# Altium PCB ControlPlateSTM32.PcbDoc
Units mm, origin at the board's own origin, x right, y up, seen from the top; angles counter-clockwise.
Board outline 208.41 x 101.6 mm, 2 copper layers (Top Layer, Bottom Layer); 63 components, 58 nets, 200 pads, 64 vias.
Unrouted connection lines stored in the file: 2.
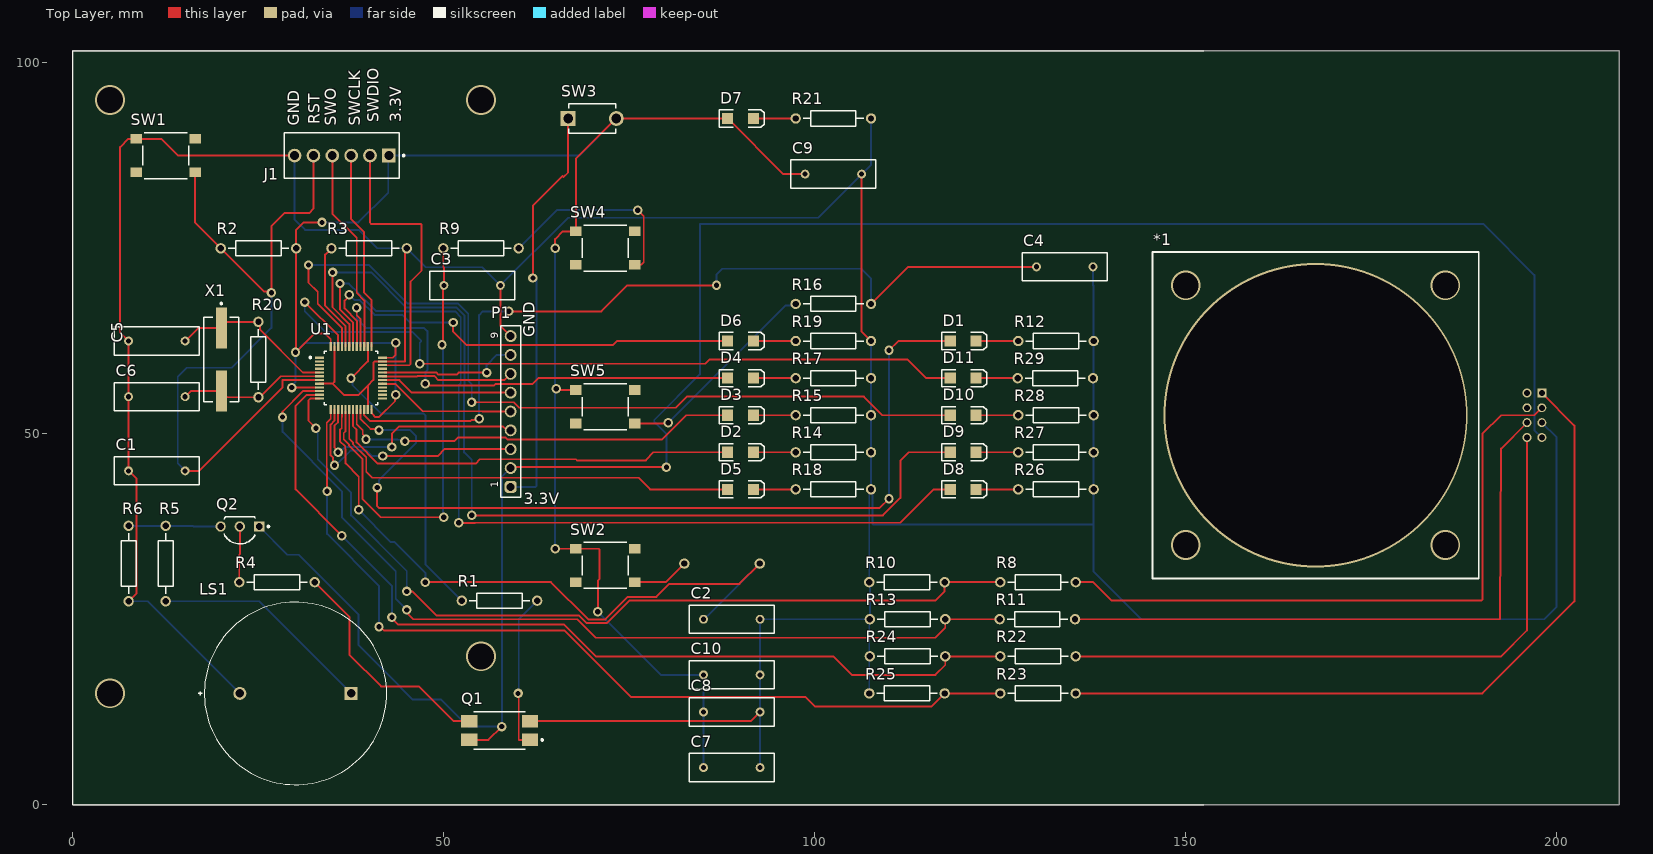
[diagram p0: Top Layer view]
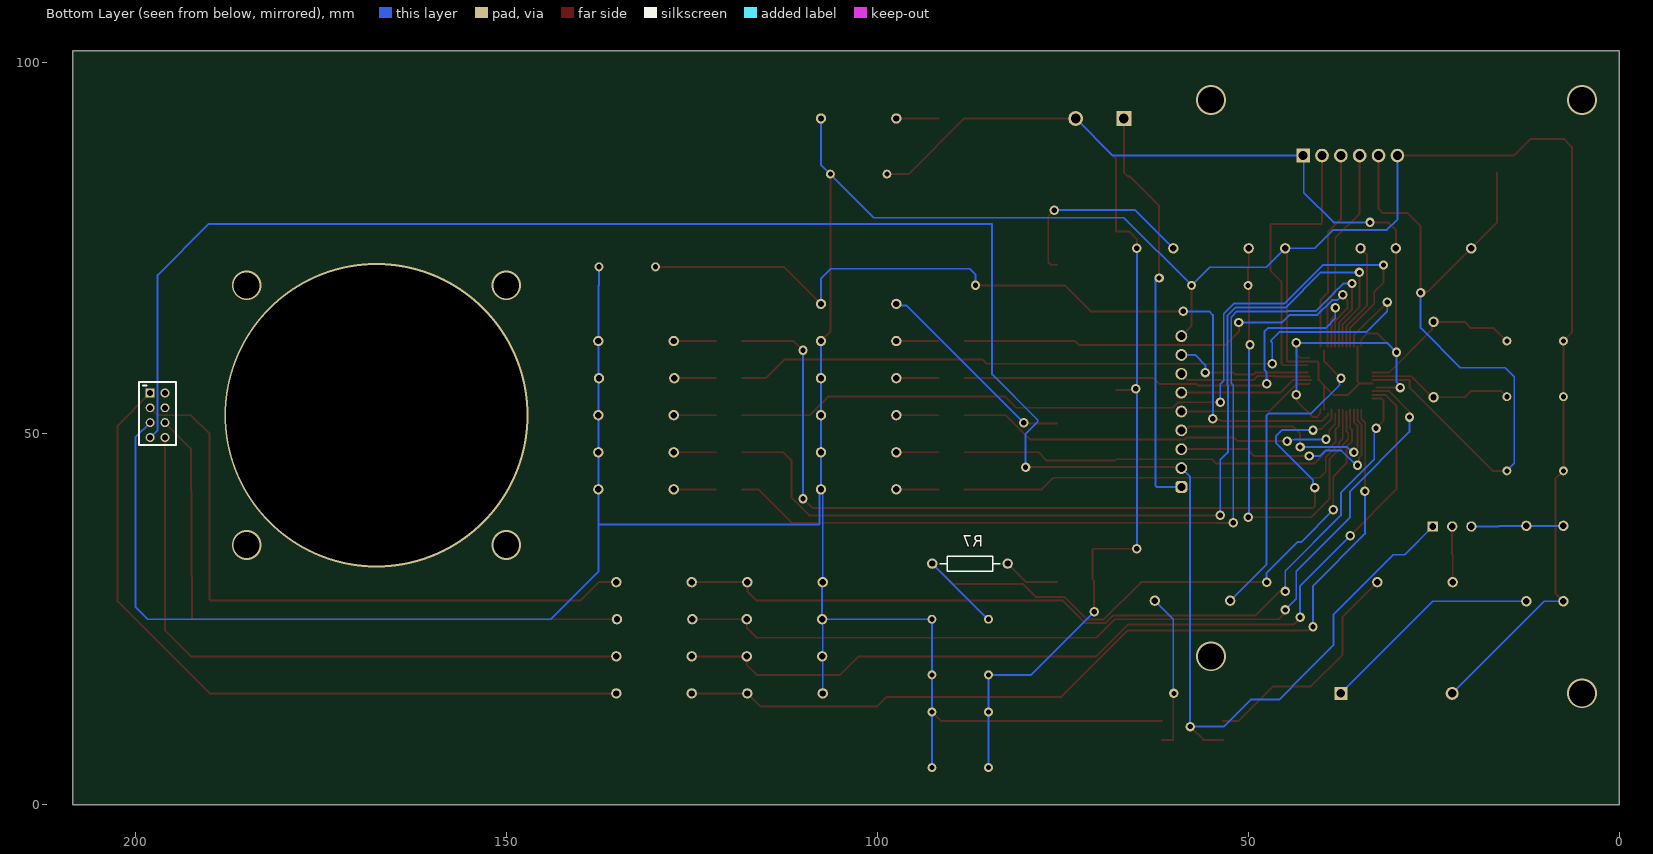
[diagram p1: Bottom Layer view, seen from below]

## Layer stack, top to bottom
Top Solder: solder mask 0.0102, Solder Resist, Dk 3.5
Top Layer: signal copper 0.0356
Dielectric 1: dielectric 0.32, FR-4, Dk 4.8
Bottom Layer: signal copper 0.0356
Bottom Solder: solder mask 0.0102, Solder Resist, Dk 3.5

## Board outline
0,0 208.407,0 208.407,101.6 0,101.6

## Design rules (kind name [scope] priority, off if disabled: settings)
Clearance [All] p1: gap=0.254 ignorepadtopadclearanceinfootprint=FALSE except(0: Arc-Hole Track-Hole SMDPad-Hole THPad-Hole Via-Hole Fill-Hole Poly-Hole Region-Hole Text-Hole; 0.1: Arc-SMDPad Track-SMDPad SMDPad-SMDPad SMDPad-Fill SMDPad-Poly SMDPad-Region)
PolygonConnect [All] p1: connectstyle=Relief reliefconductorwidth=0.254 reliefentries=4 polygonreliefangle="90 Angle" airgapwidth=0.254
RoutingVias [All] p1: holewidth=0.711 width=1.27 viastyle="Through Hole" minholewidth=0.711 minwidth=1.27 maxholewidth=0.711 maxwidth=1.27
SolderMaskExpansion [All] p1: expansion=0.102 istentingtop=FALSE
Width [All] p1: maxlimit=1 minlimit=0.254 preferedwidth=0.254 minimp=50.000000 maximp=50.000000 favimp=50.000000
30 further rules are at their usual default settings.

## Components (designator, comment, footprint, x,y, rotation, side; value= is the part's Value field where it differs from the comment)
*1 "MLX90333_JoysticPlate" MLX90333_Joy 167.5,52.5 r0 top
C1 "Cap" RAD-0.3 11.31,45 r0 top value=100uF
C2 "Cap" RAD-0.3 88.81,25 r0 top value=100uF
C3 "Cap" RAD-0.3 53.81,70 r0 top value=100uF
C4 "Cap" RAD-0.3 133.69,72.5 r0 top value=100uF
C5 "Cap" RAD-0.3 11.31,62.5 r180 top value=20pF
C6 "Cap" RAD-0.3 11.31,55 r180 top value=20pF
C7 "Cap" RAD-0.3 88.81,5 r180 top value=100nF
C8 "Cap" RAD-0.3 88.81,12.5 r180 top value=100nF
C9 "Cap" RAD-0.3 102.5,85 r180 top value=4.7uF
C10 "Cap" RAD-0.3 88.81,17.5 r180 top value=10nF
D1 "LED2" 3.2X1.6X1.1 120,62.5 r0 top
D2 "LED2" 3.2X1.6X1.1 90,47.5 r0 top
D3 "LED2" 3.2X1.6X1.1 90,52.5 r0 top
D4 "LED2" 3.2X1.6X1.1 90,57.5 r0 top
D5 "LED2" 3.2X1.6X1.1 90,42.5 r0 top
D6 "LED2" 3.2X1.6X1.1 90,62.5 r0 top
D7 "LED2" 3.2X1.6X1.1 90,92.5 r0 top
D8 "LED2" 3.2X1.6X1.1 120,42.5 r0 top
D9 "LED2" 3.2X1.6X1.1 120,47.5 r0 top
D10 "LED2" 3.2X1.6X1.1 120,52.5 r0 top
D11 "LED2" 3.2X1.6X1.1 120,57.5 r0 top
J1 "22-29-2061" FP-22-29-2061-MFG 36.23,87.5 r0 top
LS1 "PKB24SPCH3601-B0" FP-PKB24SPCH3601-B0-MFG 30,15 r180 top
P1 "61300911121" 61300911121 59,53 r90 top
Q1 "PC817XNNIP0F" FP-PC817XNNIP0F-MFG 57.5,10 r180 top
Q2 "BC337-40ZL1G" ONSC-TO-92-3-29-11_AM_BL 22.5,37.5 r180 top
R1 "Res2" AXIAL-0.4 57.5,27.5 r0 top value=100
R2 "Res2" AXIAL-0.4 25,75 r180 top value=5K
R3 "Res2" AXIAL-0.4 39.92,75 r180 top value=100K
R4 "Res2" AXIAL-0.4 27.5,30 r180 top value=1K
R5 "Res2" AXIAL-0.4 12.5,32.5 r90 top value=1K
R6 "Res2" AXIAL-0.4 7.5,32.5 r270 top value=10K
R7 "Res2" AXIAL-0.4 87.5,32.5 r0 bottom value=2K
R8 "Res2" AXIAL-0.4 130.08,30 r0 top value=220
R9 "Res2" AXIAL-0.4 55,75 r180 top value=2K
R10 "Res2" AXIAL-0.4 112.42,30 r0 top value=330
R11 "Res2" AXIAL-0.4 130,25 r0 top value=220
R12 "Res2" AXIAL-0.4 132.5,62.5 r180 top value=220
R13 "Res2" AXIAL-0.4 112.5,25 r0 top value=330
R14 "Res2" AXIAL-0.4 102.5,47.5 r180 top value=220
R15 "Res2" AXIAL-0.4 102.5,52.5 r180 top value=220
R16 "Res2" AXIAL-0.4 102.5,67.5 r0 top value=2K
R17 "Res2" AXIAL-0.4 102.5,57.5 r180 top value=220
R18 "Res2" AXIAL-0.4 102.5,42.5 r180 top value=220
R19 "Res2" AXIAL-0.4 102.5,62.5 r180 top value=220
R20 "Res2" AXIAL-0.4 25,60 r270 top value=1M
R21 "Res2" AXIAL-0.4 102.5,92.5 r180 top value=220
R22 "Res2" AXIAL-0.4 130.08,20 r0 top value=220
R23 "Res2" AXIAL-0.4 130.08,15 r0 top value=220
R24 "Res2" AXIAL-0.4 112.5,20 r0 top value=330
R25 "Res2" AXIAL-0.4 112.42,15 r0 top value=330
R26 "Res2" AXIAL-0.4 132.5,42.5 r180 top value=220
R27 "Res2" AXIAL-0.4 132.5,47.5 r180 top value=220
R28 "Res2" AXIAL-0.4 132.5,52.5 r180 top value=220
R29 "Res2" AXIAL-0.4 132.42,57.5 r180 top value=220
SW1 "430152043836" WS-TASV_L6W6H4.3_4301x20438x6 12.5,87.5 r180 top
SW2 "430152043836" WS-TASV_L6W6H4.3_4301x20438x6 71.78,32.25 r0 top
SW3 "EVQ-PE405Q" FP-EVQ-PE405Q-MFG 70,92.5 r0 top
SW4 "430152043836" WS-TASV_L6W6H4.3_4301x20438x6 71.78,75.032 r0 top
SW5 "430152043836" WS-TASV_L6W6H4.3_4301x20438x6 71.78,53.641 r0 top
U1 "STM32F103CBT6TR" FP-LQFP48-5B-MFG 37.5,57.5 r0 top
X1 "HCM49-8.000MABJ-UT" CFM-HCM49-2_V 20,60 r270 top

## Footprints (in the part's own frame and the unit in brackets; to place one, negate y for a bottom-side part, rotate by r counter-clockwise, add the part's x,y. Pads: shape width x height; smd on the part's side, far side on the other; paste and mask are expansions set on the pad)
3.2X1.6X1.1 [mm] "SMT LED; 2 Flat Leads"
  rect 1.5x1.5 smd: 1(-1.75,0) 2(1.75,0)
  silkscreen extent -2.9,-1.15 3.2,1.15
61300911121 [mm] "Pin Header, pitch 2.54 mm, THT, Vertical, single row, 9p"
  rrect50% 1.6x1.6 hole 1.1: 1(-10.16,0)
  round 1.6 hole 1.1: 2(-7.62,0) 3(-5.08,0) 4(-2.54,0) 5(0,0) 6(2.54,0) 7(5.08,0) 8(7.62,0) 9(10.16,0)
  silkscreen extent -11.58,-1.35 11.58,1.34, body extent -11.43,-1.27 11.43,1.27, height 8.57
AXIAL-0.4 [mm] "Axial Device, Thru-Hole; 2 Leads; 0.4 in Pin Spacing"
  round 1.4 hole 0.85: 1(-5.08,0) 2(5.08,0)
  silkscreen extent -4.06,-1.02 4.06,1.02
CFM-HCM49-2_V [mm] "SMD, 2-Leads, Body 11.4x4.7mm, Pitch 8.5mm"
  rect 5.5x1.5 smd: 1(-4.25,0) 2(4.25,0)
  silkscreen extent -7.67,-2.35 5.7,2.35, body extent -5.7,-2.35 5.7,2.35, height 4.3
FP-22-29-2061-MFG [mm]
  rect 1.84x1.84 hole 1.19 paste-1000 mask+0: 1(6.35,0)
  round 1.84 hole 1.19 paste-1000 mask+0: 2(3.81,0) 3(1.27,0) 4(-1.27,0) 5(-3.81,0) 6(-6.35,0)
  silkscreen extent -7.75,-3.08 8.47,3.07, body extent -7.85,-3.17 7.85,3.17, height 0.25
FP-EVQ-PE405Q-MFG [mm]
  rect 2x2 hole 1.3 paste-1000 mask+0: A(-3.25,0)
  round 2 hole 1.3 paste-1000 mask+0: B(3.25,0)
  silkscreen extent -3.15,-2 3.15,2, body extent -4.35,-2.1 4.35,2.1, height 0.25
FP-LQFP48-5B-MFG [mm]
  rect 1.2x0.3 smd paste+0 mask+0: 1(-4.25,2.75) 2(-4.25,2.25) 3(-4.25,1.75) 4(-4.25,1.25) 5(-4.25,0.75) 6(-4.25,0.25) 7(-4.25,-0.25) 8(-4.25,-0.75) 9(-4.25,-1.25) 10(-4.25,-1.75) 11(-4.25,-2.25) 12(-4.25,-2.75) 25(4.25,-2.75) 26(4.25,-2.25) 27(4.25,-1.75) 28(4.25,-1.25) 29(4.25,-0.75) 30(4.25,-0.25) 31(4.25,0.25) 32(4.25,0.75) 33(4.25,1.25) 34(4.25,1.75) 35(4.25,2.25) 36(4.25,2.75)
  rect 0.3x1.2 smd paste+0 mask+0: 13(-2.75,-4.25) 14(-2.25,-4.25) 15(-1.75,-4.25) 16(-1.25,-4.25) 17(-0.75,-4.25) 18(-0.25,-4.25) 19(0.25,-4.25) 20(0.75,-4.25) 21(1.25,-4.25) 22(1.75,-4.25) 23(2.25,-4.25) 24(2.75,-4.25) 37(2.75,4.25) 38(2.25,4.25) 39(1.75,4.25) 40(1.25,4.25) 41(0.75,4.25) 42(0.25,4.25) 43(-0.25,4.25) 44(-0.75,4.25) 45(-1.25,4.25) 46(-1.75,4.25) 47(-2.25,4.25) 48(-2.75,4.25)
  silkscreen extent -5.62,-3.6 3.6,3.6, body extent -4.95,-4.95 4.95,4.95, height 0.25
FP-PC817XNNIP0F-MFG [mm]
  rect 2.2x1.7 smd paste+0 mask+0: 1(-4.1,1.27) 2(-4.1,-1.27) 3(4.1,-1.27) 4(4.1,1.27)
  silkscreen extent -5.88,-2.54 3.5,2.54, body extent -5.3,-2.64 5.3,2.64, height 0.25
FP-PKB24SPCH3601-B0-MFG [mm]
  rect 1.75x1.75 hole 1.15 paste-1000 mask+0: 1(-7.5,0)
  round 1.75 hole 1.15 paste-1000 mask+0: 2(7.5,0)
  silkscreen extent -12.3,-12.3 13.1,12.3, body extent -12.4,-12.4 12.4,12.4, height 0.25
MLX90333_Joy [mm]
  rect 1.2x1.2 hole 0.8: 1(30.5,3)
  round 1.2 hole 0.8: 2(28.5,3) 3(30.5,1) 4(28.5,1) 5(30.5,-1) 6(28.5,-1) 7(30.5,-3) 8(28.5,-3)
  silkscreen extent -22,-22 22,22
ONSC-TO-92-3-29-11_AM_BL [mm] "TO, 3-Leads, Body Dia 4.7mm, Pitch 2.6mm"
  rect 1.4x1.4 hole 0.9: 1(-2.6,0)
  round 1.4 hole 0.9: 2(0,0) 3(2.6,0)
  silkscreen extent -3.98,-1.34 2.13,2.35, body extent -2.84,-1.34 2.84,2.35, height 5.33
RAD-0.3 [mm] "Radial Cap, Thru-Hole; 2 Leads; 0.3 in Pin Spacing"
  round 1.2 hole 0.7: 1(-3.81,0) 2(3.81,0)
  silkscreen extent -5.71,-1.9 5.72,1.91
WS-TASV_L6W6H4.3_4301x20438x6 [mm] "SMD Tact Switch, body 6x6mm"
  rect 1.55x1.3 smd: A1(-3.975,2.25) A2(3.975,2.25) B1(-3.975,-2.25) B2(3.975,-2.25)
  silkscreen extent -3.1,-3.1 3.1,3.1, body extent -4.5,-3.1 4.5,3.1, height 4.3

## Part data
C1 C2 C3 C4 C5 C6 C7 C8 C9 C10: "Capacitor", LatestRevisionDate=17-Jul-2002, LatestRevisionNote="Re-released for DXP Platform.", PackageDescription="Radial Cap, Thru-Hole; 2 Leads; 0.3 in Pin Spacing", PackageReference=RAD-0.3, Published=8-Jun-2000, Publisher="Altium Limited"
D1 D2 D3 D4 D5 D6 D7 D8 D9 D10 D11: "Typical RED, GREEN, YELLOW, AMBER GaAs LED", LatestRevisionDate=17-Jul-2002, LatestRevisionNote="Re-released for DXP Platform.", PackageDescription="SM LED; 2 Flat Leads", PackageReference=3.2X1.6X1.1, PackageVersion=Feb-2002, Published=8-Jun-2000, Publisher="Altium Limited"
J1: library part CMP-04776-000348-1, "CONN HEADER VERT 6POS 2.54MM", Color=Natural, Contact Resistance=10mR, Current Rating=4A, Flammability Rating="UL94 V-0", Housing Color=White, Insulation Resistance=50GR, Max Operating Temperature=75°C, Min Operating Temperature=0°C, Package Quantity=1000, Voltage Rating=250V, Contact Gender=Male, Contact Material=Brass, Contact Mating Length=0.295inch, Contact Plating=Gold, Contact Type="Male Pin", Depth=5.8mm, Fastening Type=Friction, Gender=Male, Height=11.7mm, Housing Material=Nylon, Lead Free="Lead Free", Length=15.24mm, Max Current Rating=4A, Mount="Through Hole", Number of Contacts=6, Number of Lines=1, Number of Poles=6, Number of Positions=6, Number of Rows=1, Orientation=Straight, Packaging=Bulk, Pitch=2.54mm, Radiation Hardening=No, RoHS Compliant=Yes, Series="KK® 6410", Termination=Solder, Voltage Rating (DC)=250V
LS1: library part CMP-06203-000001-2, "AUDIO PIEZO TRANSDUCER 3-15V TH", Frequency=3.6kHz, Max Frequency=4.1kHz, Max Operating Temperature=70°C, Max Supply Current=16mA, Max Supply Voltage=15V, Min Operating Temperature=-20°C, Min Supply Voltage=3V, Nominal Supply Voltage (DC)=12V, Package Quantity=650, Diameter=24.3mm, Height=9.7mm, Lead Free="Lead Free", Length=24.3mm, Max Supply Voltage (DC)=15V, Min Supply Voltage (DC)=3V, Mount=Flush, Nominal Supply Current=16mA, Operating Supply Current=16mA, Packaging=Bulk, Radiation Hardening=No, REACH SVHC="No SVHC", Self Resonant Frequency=3.6kHz, Termination="PC Pins", Voltage Rating=12V, Voltage Rating (DC)=15V, Washable=No
P1: library part CMP-1502-01080-2, Color=Black, Contact Resistance=20mΩ, Current Rating=3A, Operating Supply Voltage=250V, Connector Type="Male Pin", Contact Material=Copper, Contact Mating Length=5.9944mm, Contact Plating=Gold, Gender=Male, Lead Pitch=2.54mm, Mount="Through Hole", NexarPartId=32855536, Number of Contacts=9, Number of Pins=9, Number of Positions=9, Number of Rows=1, Orientation=Vertical, Packaging=Bulk, Pitch=2.54mm, REACH SVHC=Unknown, RoHS=Compliant, Termination=Solder
Q1: library part CMP-65434-000005-1, "OPTOISOLATOR 5KV TRANS 4SMD", Case/Package=SMD/SMT, Collector Emitter Saturation Voltage=200mV, Collector Emitter Voltage (VCEO)=80V, Forward Current=50mA, Forward Voltage=1.4V, Isolation Voltage=5kV, Max Operating Temperature=100°C, Max Power Dissipation=200mW, Min Operating Temperature=-30°C, Output Current per Channel=30mA, Package Quantity=2000, Reverse Breakdown Voltage=6V, Collector-emitter Voltage-Max=200mV, Contact Plating=Copper, Fall Time=18000ns, Input Current=50mA, Input Type=DC, Isolation Voltage-Max=5kV, Lead Free="Lead Free", Max Collector Current=50mA, Max Input Current=50mA, Max Output Voltage=80V, Mount="Surface Mount", Number of Channels=1, Number of Elements=1, Number of Pins=4, Output Voltage=80V, Packaging="Tape and Reel", Power Dissipation=200mW, Radiation Hardening=No, Rise Time=18000ns, RoHS Compliant=Yes
Q2: library part CMP-1048-01583-1, "Amplifier Transistor, NPN Silicon, 3-Pin TO-92, Pb-Free, Ammo Box", Manufacturer="On Semiconductor", ComponentLink1Description="Manufacturer URL", ComponentLink1URL=http://www.onsemi.com/, ComponentLink2Description=Datasheet, ComponentLink2URL=http://www.onsemi.com/pub_link/Collateral/BC337-D.PDF, ComponentLink3Description="Package Specification", ComponentLink3URL=http://www.onsemi.com/pub_link/Collateral/MAC97-D.PDF, DatasheetVersion="Rev. 8", IC Continuous (A)=0.8, Mounting Technology="Through Hole", PackageDescription="3-Pin Transistor Outline, Body 4.825 x 3.685 mm, Pitch 1.27 mm", PackageReference=TO-92-3-29-11_AM_BL, PackageVersion="Rev. AM", Packing="Ammo Box", PartNumber=BC337-40ZL1G, Polarity=NPN, RoHS=TRUE
R1 R2 R3 R4 R5 R6 R7 R8 R9 R10 R11 R12 R13 R14 R15 R16 R17 R18 R19 R20 R21 R22 R23 R24 R25 R26 R27 R28 R29: "Resistor", LatestRevisionDate=17-Jul-2002, LatestRevisionNote="Re-released for DXP Platform.", PackageDescription="Axial Device, Thru-Hole; 2 Leads; 0.4 in Pin Spacing", PackageReference=AXIAL-0.4, Published=8-Jun-2000, Publisher="Altium Limited"
SW1 SW2 SW4 SW5: library part CMP-1452-00002-2, Color=Orange, Contact Current Rating=50mA, Insulation Resistance=100MΩ, Max Operating Temperature=85°C, Min Operating Temperature=-40°C, Voltage Rating=12V, Actuator Length=900µm, Actuator Material="Liquid Crystal Polymer, Polymer", Contact Material="Stainless Steel, Steel", Contact Plating=Silver, Current Rating=50mA, Diameter=3.5mm, Height=4.3mm, Illumination Type="Illuminated, Non-Illuminated", Length=6.2mm, Mechanical Life=200kcycles, Mount="Surface Mount", NexarPartId=22861785, Packaging="Tape and Reel", REACH SVHC="No SVHC", RoHS=Compliant, Switch Function=Off-Mom, Switch Travel=250µm, Termination="Gull Wing", Throw Configuration=SPST, Width=6.2mm
SW3: library part CMP-05618-000107-1, "SWITCH TACTILE SPST-NO 0.05A 12V", Actuator Color=Grey, Contact Current Rating=50mA, Contact Resistance=100mR, Max Operating Temperature=85°C, Max Voltage Rating (DC)=12V, Min Operating Temperature=-30°C, Operating Force=1N, Package Quantity=1000, Actuator Length=1.5mm, Actuator Type=Standard, Contact Plating=Silver, Current Rating=50mA, Depth=7.9mm, Electrical Life=50000Cycles, Height=5mm, Illumination Type=Non-Illuminated, Lead Free="Lead Free", Length=6mm, Max Current Rating=50mA, Mechanical Life=50000Cycles, Mount="Through Hole", Orientation=Straight, Packaging=Bulk, REACH SVHC="No SVHC", Series=EVQPE, Size=3.5mm, Switch Function=Off-Mom, Switch Travel=0.25mm, Termination="PC Pin", Throw Configuration=SPST, Voltage Rating (DC)=12V, Width=3.5mm
U1: library part CMP-0237-00247-4, Ambient Temperature Range High=105°C, Case/Package=LQFP, Frequency=72MHz, Max Operating Temperature=85°C, Max Power Dissipation=363mW, Max Supply Voltage=3.6V, Min Operating Temperature=-40°C, Min Supply Voltage=2V, Nominal Supply Current=1.7µA, Core Architecture=ARM, Data Bus Width=32b, Flash Memory Size=128kB, Height=1.6mm, Interface="CAN, I2C, IrDA, LIN, SPI, USART, USB", Lead Free="Lead Free", Length=7mm, Lifecycle Status=Production, Max Frequency=72MHz, Max Junction Temperature (Tj)=105°C, Memory Size=128kB, Memory Type=FLASH, NexarPartId=12442975, Number of A/D Converters=2, Number of ADC Channels=10, Number of Channels=10, Number of I2C Channels=2, Number of I/Os=37, Number of Pins=48, Number of Programmable I/O=37, Number of PWM Channels=4, Number of SPI Channels=2, Number of Timers/Counters=4, Number of UART Channels=3, Number of USART Channels=3, Number of USB Channels=1, Oscillator Type=Internal, Packaging="Tape & Reel (TR)", Peripherals="DMA, I2C, POR, PWM, Temp Sensor, WDT", Radiation Hardening=No, RAM Size=20kB, RoHS=Compliant, Schedule B=8542310000, Watchdog Timer=Yes
X1: library part CMP-1215-00001-1, "At-Cut Crystal Unit, 3.5 to 30 MHz, -40 to 85 degC, 2-Pin 11.4Ã—4.7Ã—4.3 mm SMD, RoHS, Reel", Manufacturer="Citizen Finetech Miyota", Operating Temperature="-40 to 85 degC", C0="7 pF Max.", ComponentLink1Description="Manufacturer URL", ComponentLink1URL=http://cfm.citizen.co.jp/english/index.html, ComponentLink2Description=Datasheet, ComponentLink2URL=http://cfm.citizen.co.jp/english/product/pdf/HCM49.pdf, ComponentLink3Description="Package Specification", ComponentLink3URL=http://cfm.citizen.co.jp/english/product/pdf/HCM49.pdf, DatasheetVersion=Jan-12, DL="100 uW", f0="3.5 to 30 MHz", IR="500 MOhm Min.", Mounting Technology="Surface Mount", PackageDescription="2-Pin Surface Mount, Body 11.4 x 4.7 mm, Pitch 8.5 mm", Packing=Reel, PartNumber=HCM49-8.000MABJ-UT, R1="50 to 200 Ohm", RoHS=TRUE

## Via types
v1: diameter 1.27, hole 0.711, Top Layer to Bottom Layer, 55 vias
v2: diameter 4, hole 3.5, Top Layer to Bottom Layer, 8 vias
v3: diameter 41, hole 40.5, Top Layer to Bottom Layer, 1 vias

## Nets (pads, with @x,y where several pads share a name; then routed paths per layer and width w, separated by ;. In a path a pad name is that pad's centre, name@x,y a point inside that pad or via, vN(x,y) a via of type N, cw(c..) or ccw(c..) an arc to the next point about the centre after c; other vN are vias at no path point)
3.3v: C7.2 C8.2 C9.2 C10.2 D7.1 J1.1 R2.1 SW2.A1 SW3.B SW4.A1 SW5.A1 U1.9 U1.24 U1.36 U1.48 | length 252.8
  Top Layer w0.254: v1(29.5,56.226) 29.524,56.25 30.782,56.25 30.79,56.258 U1.9@32.727,56.258 ; v1(30,61) v1@30.08,61.08 ; v1(33.566,78.486) 31.096,78.486 30.08,77.47 R2.1 v1@30.08,61.08 ; U1.48 34.75,62.75 34,63.5 32.5,63.5 v1@30.08,61.08 ; U1.24 40.273,53.227 40.273,52.777 40.57,52.48 40.57,52.399 40.718,52.25 41.25,52.25 43.411,54.411 43.411,55.161 v1(43.5,55.25) ; U1.36 42.5,60.25 43.125,60.25 43.5,60.625 v1(43.5,62.25) ; v1(65,34.5) SW2.A1 70.851,34.5 71,34.351 71,30.438 70.75,30.188 v1(70.75,26) ; v1@65,56 65.109,55.891 SW5.A1 ; v1(65,75) 65,76.25 66.032,77.282 SW4.A1 67.805,87.055 SW3.B D7.1 95.75,85 C9.2
  Bottom Layer w0.254: v1(29.5,56.226) 29.5,56.501 30,57.001 v1(30,61) 31.25,62.25 v1(43.5,62.25) v1(43.5,55.25) ; v1(33.566,78.486) 38.486,78.486 42.5,82.5 42.5,87.42 J1.1 68.25,87.5 SW3.B ; v1(65,34.5) v1(65,75) ; v1(70.75,26) 79.25,17.5 C10.2 C8.2 C7.2
  other v1: 65.13,56.069
5V: *1.7 P1.2 Q1.4 Q2.1 | length 281.5
  Top Layer w0.254: Q1.4 56.007,8.73 v1(57.81,10.533) ; P1.2 59.12,45.5 v1(80,45.5)
  Bottom Layer w0.254: Q2.1 28.913,33.687 30.421,33.687 38.504,25.605 38.504,21.496 42.382,17.618 45.834,14.166 49.647,14.166 53.28,10.533 v1(57.81,10.533) 57.81,44.19 P1.2 ; v1(80,45.5) 80,50 78.355,51.645 78.355,51.855 84.5,58 84.5,78.25 190.152,78.25 197.005,71.397 197.005,50.495 *1.7
ALPHA_1: *1.6 R11.2 | length 85.2
  Top Layer w0.254: R11.2 192.351,25 192.5,48 *1.6
ALPHA_1_MK: R11.1 R13.2 U1.10 | length 123.3
  Top Layer w0.254: v1(28.25,52.25) 28.25,53 31,55.75 U1.10 ; v1(45,26.25) 45,25.858 45.858,25 68,25 70.5,22.5 116.25,22.5 117.58,23.83 R13.2 R11.1 R11.1@125,25
  Bottom Layer w0.254: v1(28.25,52.25) 28.25,50.25 36.25,42.25 36.25,38.75 43.508,31.492 43.508,27.742 v1(45,26.25)
ALPHA_2: *1.3 R8.2 | length 87.7
  Top Layer w0.254: R8.2 137.5,30 140,27.5 189.851,27.5 190,27.649 190,50 192.5,52.5 197,52.5 *1.3
ALPHA_2_MK: R8.1 R10.2 U1.12 | length 117.6
  Top Layer w0.254: v1(32.75,50.75) 31.75,51.75 31.75,54.5 31.984,54.734 32.477,54.734 32.481,54.731 32.493,54.75 U1.12 ; v1(45,28.75) 45.75,28.75 48.992,25.508 68.21,25.508 69.242,24.476 71.976,24.476 75,27.5 116.25,27.5 117.5,28.75 R10.2 R8.1
  Bottom Layer w0.254: v1(32.75,50.75) 32.944,50.556 32.944,50.149 33,50.093 33,46.563 37.5,42.063 37.5,39 45,31.5 v1(45,28.75)
BAT1: D8.1 U1.42 | length 123.4
  Top Layer w0.254: v1(36,70.25) 36,67.437 35.984,67.421 35.984,66.766 37.766,64.984 U1.42@37.766,61.75 ; v1(52,38) 52.016,37.984 54.171,37.984 54.187,38 111.5,38 116,42.5 D8.1
  Bottom Layer w0.254: v1(36,70.25) 37.187,70.25 38.506,68.931 38.506,68.899 40.881,66.524 44.704,66.524 44.728,66.5 51.5,66.5 52.266,65.734 52.266,56.786 52,56.52 v1(52,38)
BAT2: D9.1 U1.43 | length 129.5
  Top Layer w0.254: v1(35,71.75) 34.984,71.734 34.984,67.048 37.258,64.774 U1.43@37.258,61.75 ; v1(53.75,39) 109.187,39 111.535,41.348 111.535,46.386 112.649,47.5 D9.1
  Bottom Layer w0.254: v1(35,71.75) 40.196,71.75 44.938,67.008 51.71,67.008 52.774,65.944 52.774,56.576 52.718,56.52 52.718,47.497 53.75,46.465 v1(53.75,39)
BAT3: D10.1 U1.45 | length 115.7
  Top Layer w0.254: v1(31.75,72.75) 31.75,70.361 33,69.111 33,67.52 35.837,64.683 35.837,64.687 36.25,64.274 U1.45 ; v1(53.734,54.25) 59.42,54.25 60.17,53.5 81.25,53.5 82.75,55 106.609,55 109.109,52.5 D10.1
  Bottom Layer w0.254: v1(31.75,72.75) 31.766,72.766 39.899,72.766 45.092,67.573 51.864,67.573 53.282,66.155 53.282,57.155 53.75,56.687 53.75,54.266 v1(53.734,54.25)
BAT4: D11.1 U1.46 | length 102.4
  Top Layer w0.254: v1(31.25,67.75) 35.75,63.25 U1.46 ; v1(46.75,59.439) 85.225,59.439 85.786,60 112.5,60 115,57.5 D11.1
  Bottom Layer w0.254: v1(31.25,67.75) 31.25,66.5 34.008,63.742 45.752,63.742 46.895,62.6 46.895,62.395 46.75,62.25 v1(46.75,59.439)
BAT5: D1.1 U1.21 | length 119.8
  Top Layer w0.254: U1.21 38.758,53.242 38.758,51.992 40.107,50.643 41.107,50.643 v1(41.25,50.5) ; v1(41,42.75) 41,40.25 41.234,40.016 74.984,40.016 75,40 108.75,40 v1(110,41.25) ; v1(110,61.25) 111.25,62.5 D1.1
  Bottom Layer w0.254: v1(41,42.75) 41.101,42.75 41.25,42.899 41.25,43.75 46.266,48.766 46.266,49.671 45.574,50.363 45.421,50.516 41.266,50.516 v1(41.25,50.5) ; v1(110,41.25) v1(110,61.25)
BETA_1: *1.8 R22.2 | length 88.3
  Top Layer w0.254: R22.2 192.5,20 196,23.5 *1.8
BETA_1_MK: R22.1 R24.2 U1.11 | length 124.7
  Top Layer w0.254: U1.11 32.777,55.25 32.468,55.25 32.46,55.242 31.492,55.242 30,53.75 30,42.5 v1(36.25,36.25) ; v1(43,25.25) 43,25.149 43.878,24.271 66.197,24.271 70.468,20 102.5,20 105,17.5 116.25,17.5 117.58,18.83 R24.2 R22.1
  Bottom Layer w0.254: v1(36.25,36.25) 43,29.5 v1(43,25.25)
BETA_2: *1.1 R23.2 | length 102.3
  Top Layer w0.254: R23.2 190,15 202.395,27.395 202.395,51.105 *1.1
BETA_2_MK: R23.1 R25.2 U1.13 | length 121.3
  Top Layer w0.254: v1(34.25,42.25) 34.25,45.313 34.21,45.353 34.21,51.479 34.742,52.011 U1.13@34.742,53.25 ; v1(41.25,24) 41.412,24 41.907,23.505 66.245,23.505 75.25,14.5 98.75,14.5 100,13.25 115.75,13.25 R25.2 R23.1
  Bottom Layer w0.254: v1(34.25,42.25) 34.25,36.5 41.25,29.5 v1(41.25,24)
BSP+: C2.1 R7.2 U1.16 | length 89.4
  Top Layer w0.254: U1.16 36.25,52.269 36.234,52.269 36.234,50.765 35.992,50.523 35.992,49.019 36.71,48.301 36.71,47.961 36.75,47.921 36.75,46 38.516,44.234 v1(38.516,39.75) ; v1(47.5,30) 64.437,30 69.453,24.984 71.766,24.984 74.79,28.008 78.646,28.008 80.388,29.75 89.83,29.75 R7.2
  Bottom Layer w0.254: v1(38.516,39.75) 42.863,35.403 43.347,35.403 47.5,31.25 v1(47.5,30) ; C2.1 85.08,25 R7.2
BSP-: C3.1 R9.2 U1.17 | length 61.4
  Top Layer w0.254: U1.17@36.742,53 36.742,50.343 36.5,50.101 36.5,49.229 37.218,48.511 37.218,48.408 39.024,46.602 39.024,41.226 41.5,38.75 v1(50,38.75) ; v1(49.75,62) 49.875,62.125 49.875,69.875 C3.1 50,72.441 49.92,72.521 R9.2
  Bottom Layer w0.254: v1(49.75,62) 49.875,61.875 49.875,38.875 v1(50,38.75)
BZ: C4.1 R16.2 U1.22 | length 114.8
  Top Layer w0.254: U1.22@39.25,52.75 39.25,52.516 40.024,51.742 53.607,51.742 53.734,51.869 54.603,51.869 v1(54.75,52.016) ; v1(58.75,66.5) 71.22,66.5 74.72,70 v1(86.75,70) ; R16.2 112.58,72.5 C4.1
  Bottom Layer w0.254: v1(54.75,52.016) 54.75,66 55.25,66.5 v1(58.75,66.5) ; v1(86.75,70) 86.75,71.5 87.5,72.25 106.25,72.25 107.58,70.92 R16.2
D1BC: P1.6 U1.30 | length 18.2
  Top Layer w0.254: U1.30@41.5,57.234 44.001,57.234 45.695,55.54 57.694,55.54 P1.6
D1FC: P1.5 U1.29 | length 18.8
  Top Layer w0.254: U1.29 41.849,56.726 43.461,56.726 47.155,53.032 55.171,53.032 55.203,53 P1.5
D2BC: P1.8 U1.32 | length 18.8
  Top Layer w0.254: U1.32@42.016,58.25 46.189,58.25 46.213,58.274 48.947,58.274 49.237,57.984 51.723,57.984 51.989,58.25 v1(55.766,58.25)
  Bottom Layer w0.254: v1(55.766,58.25) 55.766,59.266 57.12,60.62 P1.8
D2FC: P1.7 U1.31 | length 17.8
  Top Layer w0.254: U1.31@41.75,57.742 46.399,57.742 46.423,57.766 48.737,57.766 49.269,57.234 58.154,57.234 P1.7
GND: *1.5 C1.1 C2.2 C3.2 C4.2 C5.2 C6.2 C7.1 C8.1 C9.1 C10.1 J1.6 LS1.2 P1.9 Q1.2 R3.1 R6.2 R10.1 R12.1 R13.1 R14.1 R15.1 R17.1 R18.1 R19.1 R21.1 R24.1 R25.1 R26.1 R27.1 R28.1 R29.1 SW1.B2 U1.8 U1.23 U1.35 U1.47 | length 561.3
  Top Layer w0.254: R6.2 8.585,28.505 8.585,43.915 C1.1 C6.2 C5.2 6.35,63.65 6.35,88.646 7.454,89.75 SW1.B2 11.913,89.75 14.163,87.5 J1.6 ; U1.8 35,56.75 ; U1.47 35.25,57 35,56.75 ; U1.23 39.75,56.5 ; U1.35@41.75,59.742 43.871,59.742 43.879,59.75 44.75,59.75 44.75,73.25 44.781,73.281 44.781,74.781 R3.1 ; U1.35 40.649,59.75 40.5,59.601 40.5,57.25 39.75,56.5 ; C3.2 57.62,64.54 P1.9 ; Q1.2 91.39,11.27 C8.1 ; C9.1 106.31,63.77 R19.1 ; 35,56.75 36.5,55.25 38.5,55.25 39.75,56.5
  Bottom Layer w0.254: R6.2 10.08,27.42 LS1.2 ; J1.6 29.88,78.87 31.28,77.47 38.53,77.47 41,75 R3.1 47.559,72.441 55.179,72.441 C3.2 66.741,79.121 100.431,79.121 C9.1 107.58,86.27 R21.1 ; C7.1 C8.1 C10.1 C2.2 R13.1 ; R25.1 107.34,19.92 R24.1 107.34,20.08 107.34,24.92 R13.1 ; R19.1 R17.1 R15.1 R14.1 R18.1 ; C4.2 137.5,70 137.58,69.92 R12.1 R28.1 R27.1 R26.1 137.58,37.75 ; *1.5 200,49.5 200,26.67 198.33,25 144,25 137.58,31.42 137.58,37.75 ; R13.1 107.42,29.92 R10.1 107.34,41.95 107.58,42.19 R18.1 ; R18.1 107.75,42.33 107.75,37.899 107.899,37.75 137.58,37.75
NetD1_2: D1.2 R12.2 | length 5.7
  Top Layer w0.254: D1.2 R12.2
NetD2_2: D2.2 R14.2 | length 5.7
  Top Layer w0.254: D2.2 R14.2
NetD3_2: D3.2 R15.2 | length 5.7
  Top Layer w0.254: D3.2 R15.2
NetD4_2: D4.2 R17.2 | length 5.7
  Top Layer w0.254: D4.2 R17.2
NetD5_2: D5.2 R18.2 | length 5.7
  Top Layer w0.254: D5.2 R18.2
NetD6_2: D6.2 R19.2 | length 5.7
  Top Layer w0.254: D6.2 R19.2
NetD7_2: D7.2 R21.2 | length 5.7
  Top Layer w0.254: D7.2 R21.2
NetD8_2: D8.2 R26.2 | length 5.7
  Top Layer w0.254: D8.2 R26.2
NetD9_2: D9.2 R27.2 | length 5.7
  Top Layer w0.254: D9.2 R27.2
NetD10_2: D10.2 R28.2 | length 5.7
  Top Layer w0.254: D10.2 R28.2
NetD11_2: D11.2 R29.2 | length 5.6
  Top Layer w0.254: D11.2 R29.2
NetLS1_1: LS1.1 R5.1 | length 30.1
  Bottom Layer w0.254: R5.1 25.08,27.42 LS1.1
NetP1_1: P1.1 SW3.A | length 55.6
  Top Layer w0.254: v1(62,71) 62,80.75 66,84.75 ; 66.116,84.582 66.75,85.216 SW3.A
  Bottom Layer w0.254: P1.1 62.351,42.84 62.5,42.989 62.5,70.851 62.149,70.851 v1(62,71)
NetQ1_1: Q1.1 R1.2 | length 21.4
  Top Layer w0.254: v1(60,15) 60.096,14.904 60.096,8.73 Q1.1
  Bottom Layer w0.254: v1(60,15) 60.096,15.096 60.096,25.016 R1.2
NetQ1_3: Q1.3 R4.1 | length 31.6
  Top Layer w0.254: R4.1 37.263,25.318 37.263,20.238 41.548,15.952 46.628,15.952 51.31,11.27 Q1.3
NetQ2_2: Q2.2 R4.2 | length 7.5
  Top Layer w0.254: R4.2 22.42,33.706 22.5,33.786 Q2.2
NetQ2_3: Q2.3 R5.2 R6.1 | length 12.4
  Bottom Layer w0.254: R6.1 R5.2 16.154,37.58 16.234,37.5 Q2.3
NetR3_2: R3.2 U1.44 | length 14.8
  Top Layer w0.254: R3.2 33.984,74.144 33.984,67.266 36.75,64.5 U1.44@36.75,61.75
NetR7_1: R7.1 SW2.B2 | length 7.7
  Top Layer w0.254: SW2.B2 79.92,30 R7.1
NetR9_1: R9.1 SW4.B2 | length 26.9
  Top Layer w0.254: SW4.B2 76.581,72.782 76.937,73.137 76.937,79.35 v1(76.149,80.137)
  Bottom Layer w0.254: R9.1 65.217,80.137 v1(76.149,80.137)
NetR16_1: R16.1 SW5.B2 | length 28.3
  Top Layer w0.254: SW5.B2 80.141,51.391 v1(80.25,51.5)
  Bottom Layer w0.254: v1(80.25,51.5) 96.064,67.314 97.234,67.314 R16.1
OSCIN: C5.1 R20.1 U1.5 X1.1 | length 22.5
  Top Layer w0.254: C5.1 16.87,64.25 X1.1 20.83,65.08 R20.1 25.219,64.861 25.219,64.031 30.992,58.258 32.46,58.258 32.468,58.25 U1.5
OSCOUT: C6.1 R20.2 U1.6 X1.2 | length 20
  Top Layer w0.254: C6.1 15.87,55.75 X1.2 20.83,54.92 R20.2 25.085,54.835 28.008,57.758 30.404,57.758 30.412,57.75 U1.6
ReleOC: P1.4 U1.15 | length 32.2
  Top Layer w0.254: v1(35.734,47.5) 35.734,47.673 35.25,48.157 35.25,51.048 35.726,51.524 35.726,52.008 35.75,52.008 U1.15 ; v1(43,48.218) 43,50 44,51 57.928,51 58.211,50.718 58.742,50.718 P1.4
  Bottom Layer w0.254: v1(35.734,47.5) 35.989,47.5 36.723,48.234 42.984,48.234 v1(43,48.218)
RST: C1.2 J1.5 R2.2 SW1.A1 U1.7 | length 100.8
  Top Layer w0.254: C1.2 17,45 28.25,56.25 28.25,57.242 ; SW1.A1 16.475,78.445 R2.2 25.734,69.186 26.564,69.186 v1(26.75,69) 26.75,78 28.5,79.75 31.84,79.75 32.42,80.33 J1.5 ; 28.25,57.25 28.25,57.242 ; U1.7 31.758,57.25 31.75,57.242 28.25,57.242
  Bottom Layer w0.254: C1.2 14.122,45.998 14.122,57.658 15.367,58.903 21.387,58.903 26.75,64.266 v1(26.75,69)
SP1: D5.1 U1.18 | length 59
  Top Layer w0.254: 37.25,51 37.25,49.313 37.726,48.837 37.726,48.619 39.532,46.813 39.532,44.856 40.319,44.069 76.236,44.069 77.805,42.5 D5.1 ; 37.25,51 U1.18
SP2: D2.1 U1.19 | length 56.6
  Top Layer w0.254: U1.19 37.75,52.418 37.75,51.032 38.234,50.548 38.234,48.829 41.079,45.984 54.276,45.984 54.853,46.561 67.799,46.561 67.962,46.399 77.25,46.399 77.25,46.5 78.25,47.5 D2.1
SP3: D3.1 U1.20 | length 54.5
  Top Layer w0.254: U1.20@38.25,52.75 38.25,51.25 39.056,50.444 39.056,49.907 39.5,49.462 v1(39.5,49.25) ; v1(44.75,49) 51.407,49 51.907,49.5 58.29,49.5 58.54,49.25 79.437,49.25 82.687,52.5 D3.1
  Bottom Layer w0.254: v1(39.5,49.25) 39.516,49.234 43.722,49.234 43.762,49.194 44.556,49.194 v1(44.75,49)
SP4: D4.1 U1.40 | length 65.7
  Top Layer w0.254: v1(38.234,67) 38.25,66.984 38.25,65.968 38.782,65.436 38.782,61.75 U1.40 ; v1(47.5,56.75) 47.5,56.641 47.649,56.492 56.746,56.492 56.975,56.721 61.971,56.721 62.75,57.5 D4.1
  Bottom Layer w0.254: v1(38.234,67) 38.25,66.984 38.25,65.548 39.548,64.25 47.351,64.25 47.766,63.835 47.766,58.575 47.5,58.309 v1(47.5,56.75)
SP5: D6.1 U1.41 | length 62.7
  Top Layer w0.254: v1(37.25,68.75) 37.25,68.595 36.609,67.954 36.609,66.891 38.274,65.226 U1.41@38.274,61.75 ; v1(51.25,65) 51.25,63.75 53.021,61.979 72.808,61.979 73.329,62.5 D6.1
  Bottom Layer w0.254: v1(37.25,68.75) 37.984,68.016 38.671,68.016 40.671,66.016 44.394,66.016 45.41,65 v1(51.25,65)
SWCLK: J1.3 U1.37 | length 26.9
  Top Layer w0.254: J1.3 37.5,78.91 39.25,77.16 39.25,69.032 40.266,68.016 40.266,64.579 40.25,64.563 U1.37
SWDIO: J1.2 U1.34 | length 39.1
  Top Layer w0.254: J1.2 40.04,78.444 40.189,78.296 46.851,78.296 47,78.147 47,75 47.006,74.994 47.006,72.006 45.5,70.5 45.5,59.399 45.335,59.234 U1.34@42,59.234
SWO: J1.4 U1.39 | length 27.6
  Top Layer w0.254: J1.4 34.96,79.68 38.25,76.39 38.25,69 39.29,67.96 39.29,61.75 U1.39
VBAT: P1.3 U1.14 | length 33.2
  Top Layer w0.254: v1(35.25,45.75) 35.056,45.944 35.056,46.742 34.718,47.079 34.718,51.234 35.25,51.766 U1.14 ; v1(41.75,47) 49.157,47 50.117,47.96 58.96,47.96 P1.3
  Bottom Layer w0.254: v1(35.25,45.75) 35.437,45.75 37.413,47.726 39.605,47.726 40.331,47 v1(41.75,47)
ZoomerC: R1.1 U1.38 | length 44.2
  Top Layer w0.254: v1(37.484,57.5) 39.75,59.766 U1.38@39.75,61.25
  Bottom Layer w0.254: v1(37.484,57.5) 37.678,57.306 37.678,56.572 41.5,52.75 47.25,52.75 47.5,52.5 47.5,32.42 R1.1
pads on no net: *1.2 *1.4 SW1.A2 SW1.B1 SW2.A2 SW2.B1 SW4.A2 SW4.B1 SW5.A2 SW5.B1 U1.1 U1.2 U1.3 U1.4 U1.25 U1.26 U1.27 U1.28 U1.33
copper on no net:
  other v2: 5,15 55,20 150,35 185,35 150,70 185,70 5,95 55,95
  other v3: 167.5,52.5

## Other copper
Top Layer:

## Silkscreen, mask and mechanical layers (free items; w line width, h text height)
Top Overlay:
  lines w0.1: 0,101.6 0,0 152.4,0 ; 0.025,101.6 152.425,101.6
  text "SWDIO" at 41.246,92.004 h1.52 r90
  text "3.3V" at 44.246,92.004 h1.52 r90
  text "RST" at 33.246,91.754 h1.52 r90
  text "GND" at 30.496,91.504 h1.52 r90
  text "SWO" at 35.496,91.504 h1.52 r90
  text "SWCLK" at 38.746,91.504 h1.52 r90
  text "GND" at 62.246,63.004 h1.52 r90
  text "3.3V" at 60.754,40.504 h1.52

## Text inside footprints (layer, text, board x,y; h text height)
P1: Top Overlay "9" at 57.3,62.78 h1.02 r90; Top Overlay "1" at 57.3,42.72 h1.02 r90